# Altium PCB Keypadmacro.PcbDoc
Units mm, origin at the board's own origin, x right, y up, seen from the top; angles counter-clockwise.
Board outline 70 x 90 mm, 2 copper layers (F.Cu, B.Cu); 22 components, 0 nets, 131 pads, 0 vias.
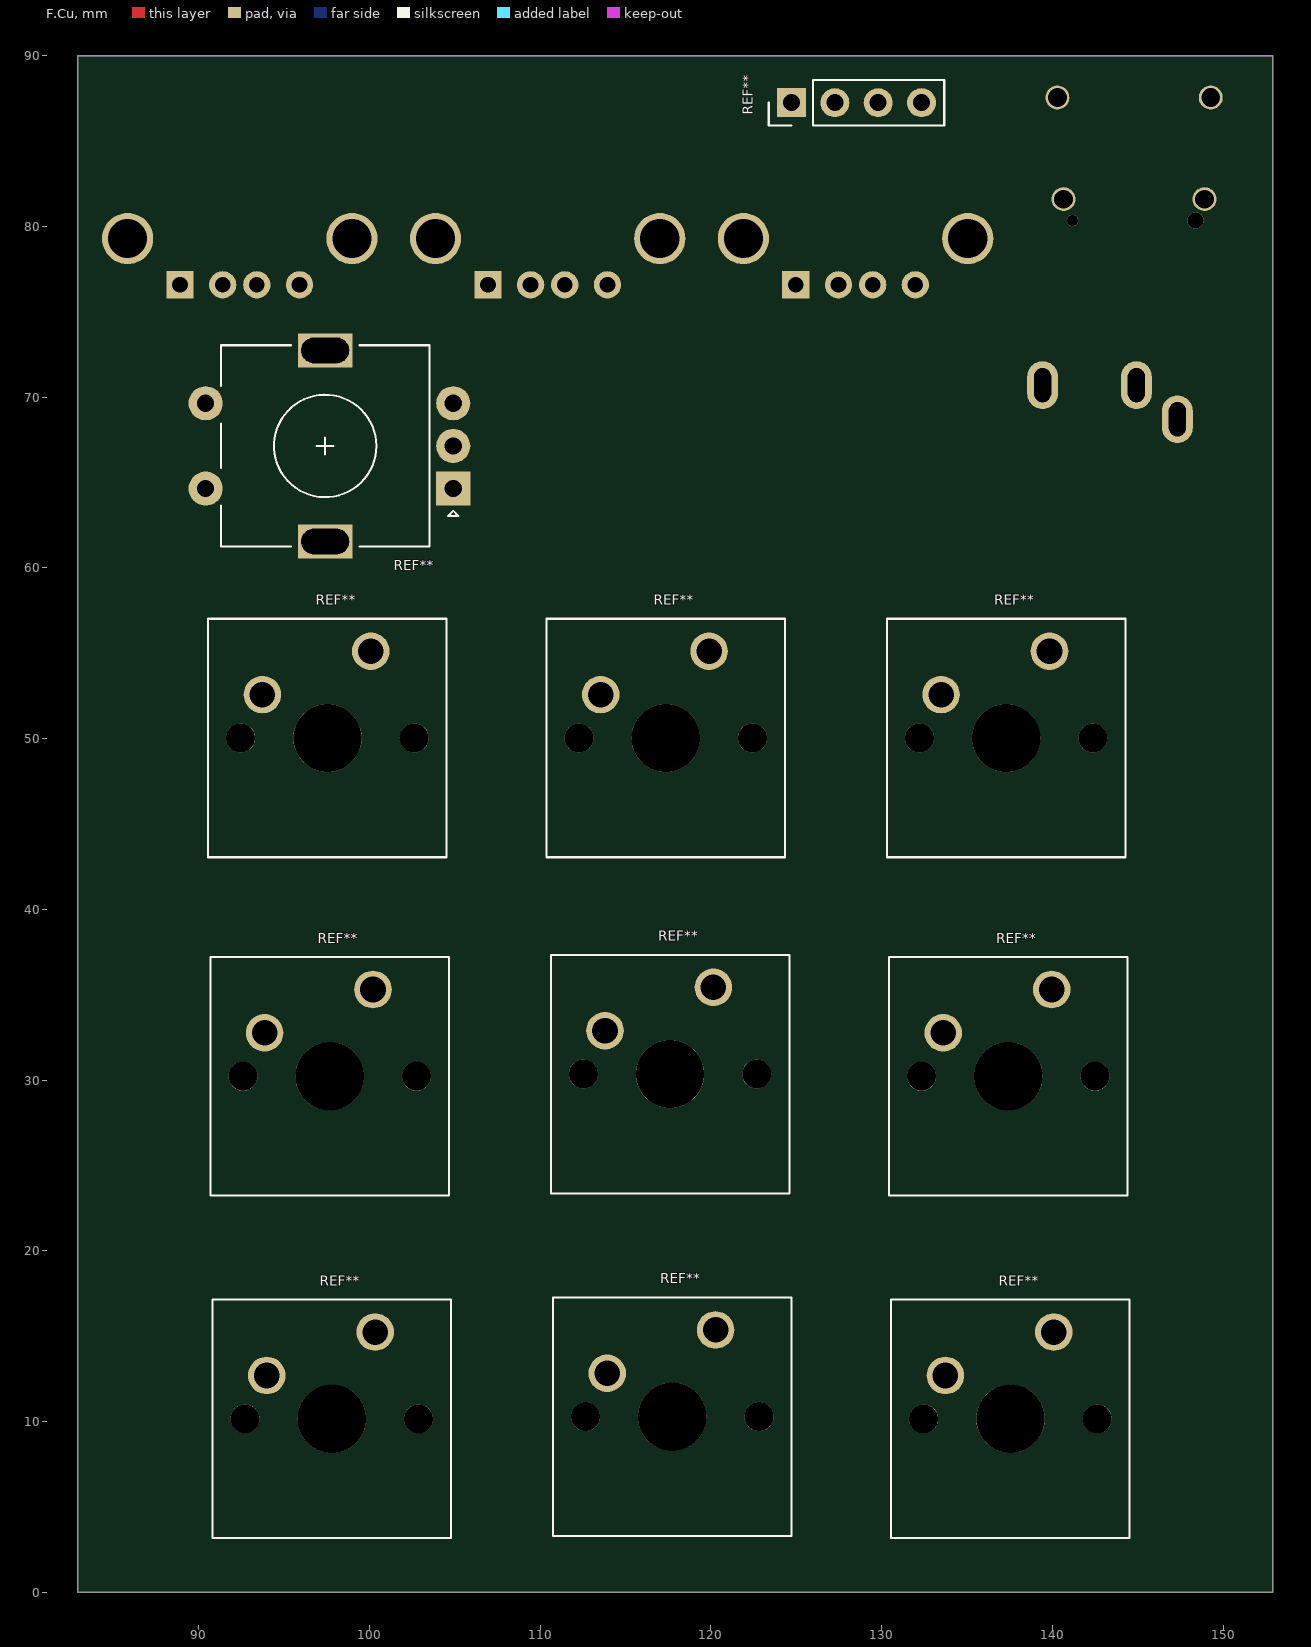
[diagram p0: F.Cu view]
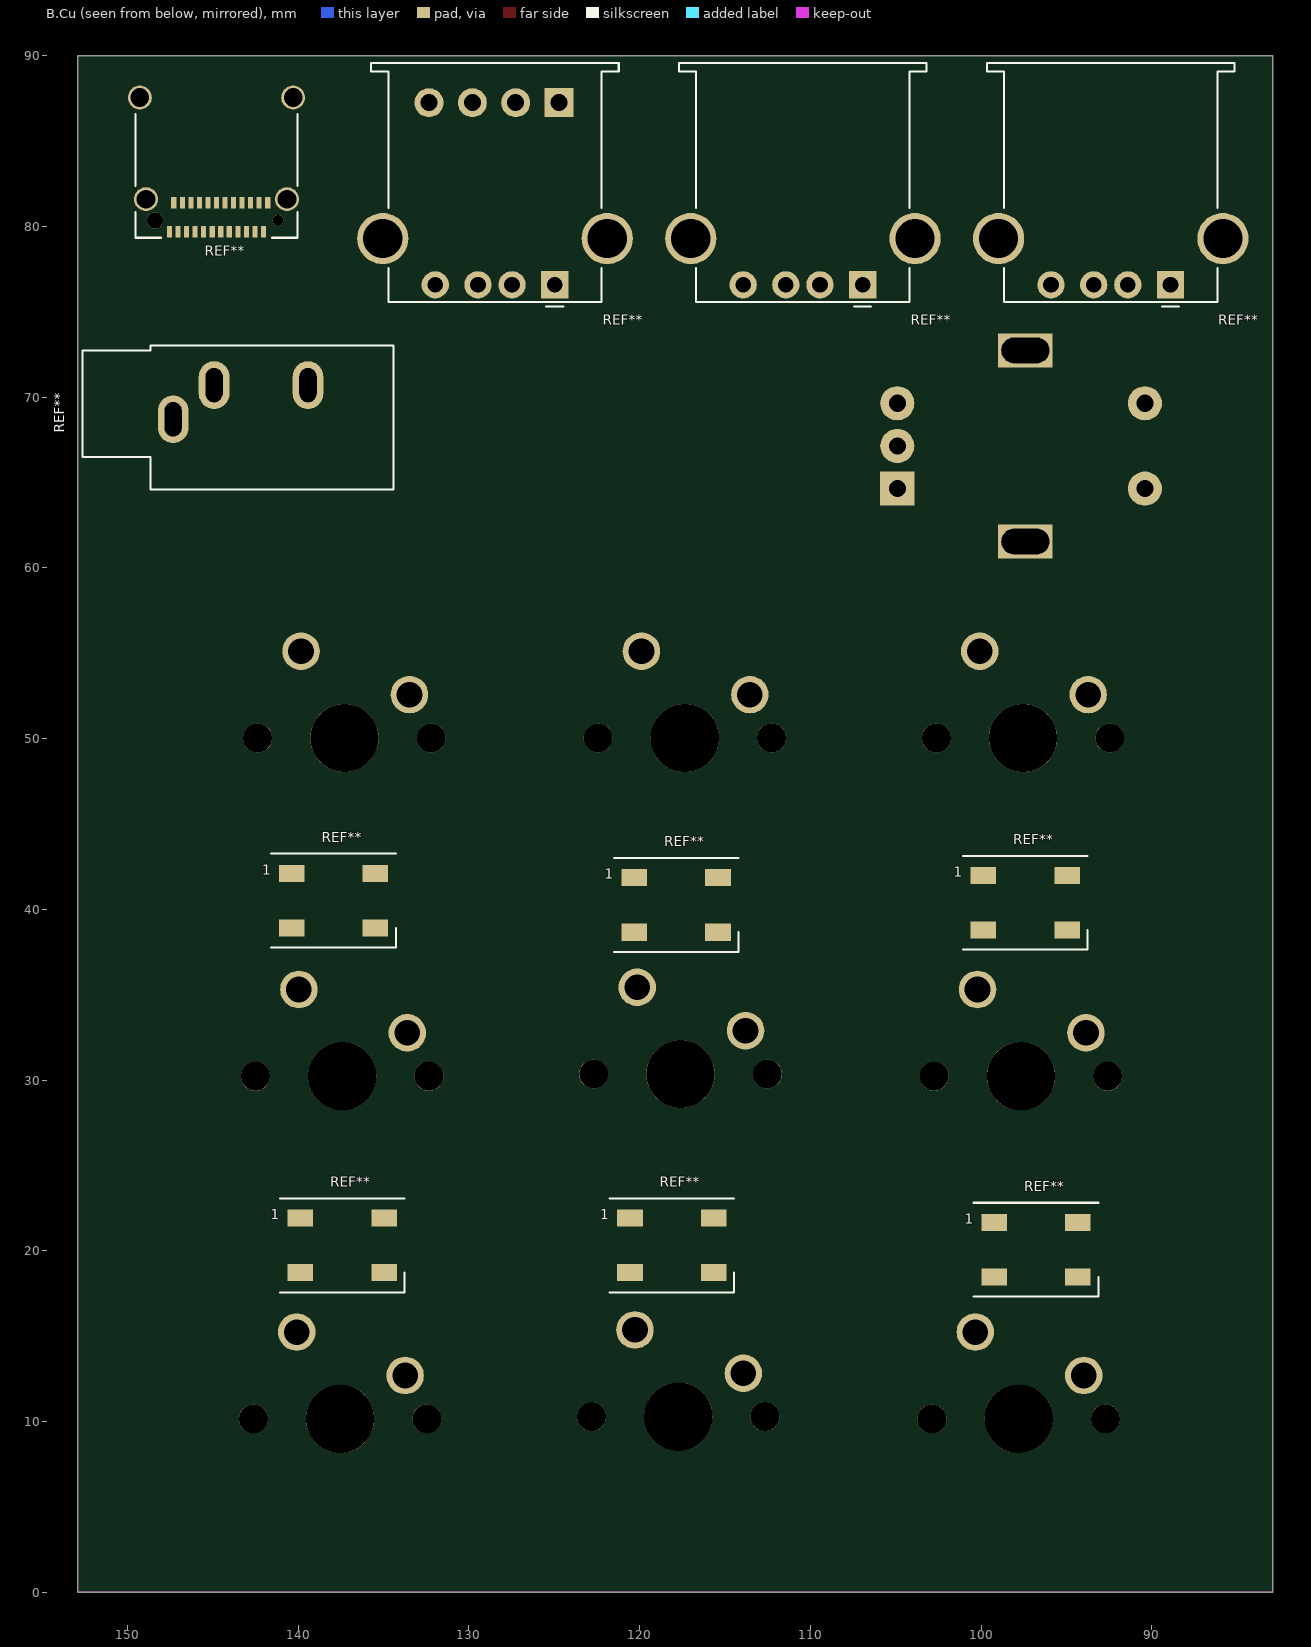
[diagram p1: B.Cu view, seen from below]

## Layer stack, top to bottom
F.Mask: solder mask 0.0102, Solder Resist, Dk 3.5
F.Cu: signal copper 0.0356
Dielectric 1: dielectric 0.32, FR-4, Dk 4.8
B.Cu: signal copper 0.0356
B.Mask: solder mask 0.0102, Solder Resist, Dk 3.5

## Board outline
82.908,0 82.908,90 152.908,90 152.908,0 82.908,0

## Design rules (kind name [scope] priority, off if disabled: settings)
Clearance "Clearence 0,2_NetClass" [InNetClass('Default')] p1: gap=0.2 ignorepadtopadclearanceinfootprint=FALSE
HoleSize "Hole Size (Default)" [All] p1: absolutevalues=TRUE maxlimit=10 minlimit=0.3 maxpercent=80.000 minpercent=20.000
MinimumSolderMaskSliver [All] p1: minsoldermaskwidth=0
PolygonConnect [All] p1: connectstyle=Direct reliefconductorwidth=0.254 reliefentries=4 polygonreliefangle="90 Angle" airgapwidth=0.254
RoutingVias [All] p1: holewidth=0.711 width=1.27 viastyle="Through Hole" minholewidth=0.711 minwidth=1.27 maxholewidth=0.711 maxwidth=1.27
SilkToSilkClearance [All] p1: silktosilkclearance=0
SilkToSolderMaskClearance [IsPad] p1: minsilkscreentomaskgap=0 clearancetoexposedcopper=TRUE
SolderMaskExpansion [All] p1: expansion=0.102 istentingtop=FALSE
Width [All] p1: maxlimit=0.254 minlimit=0.254 preferedwidth=0.254
26 further rules are at their usual default settings.

## Components (designator, comment, footprint, x,y, rotation, side; value= is the part's Value field where it differs from the comment)
REF** "LED_WS2812B_PLCC4_5.0x5.0mm_P3.2mm" LED_WS2812B_PLCC4_5.0x5.0mm_P3.2mm 97.409,40.386 r0 bottom
REF** "SW_Cherry_MX_1.00u_PCB" SW_Cherry_MX_1.00u_PCB#1 100.076,55.118 r0 top
REF** "SW_Cherry_MX_1.00u_PCB" SW_Cherry_MX_1.00u_PCB#2 119.888,55.118 r0 top
REF** "SW_Cherry_MX_1.00u_PCB" SW_Cherry_MX_1.00u_PCB#2 139.827,55.118 r0 top
REF** "SW_Cherry_MX_1.00u_PCB" SW_Cherry_MX_1.00u_PCB#2 100.203,35.306 r0 top
REF** "SW_Cherry_MX_1.00u_PCB" SW_Cherry_MX_1.00u_PCB#2 120.142,35.433 r0 top
REF** "SW_Cherry_MX_1.00u_PCB" SW_Cherry_MX_1.00u_PCB#2 139.954,35.306 r0 top
REF** "SW_Cherry_MX_1.00u_PCB" SW_Cherry_MX_1.00u_PCB#1 120.269,15.367 r0 top
REF** "SW_Cherry_MX_1.00u_PCB" SW_Cherry_MX_1.00u_PCB#1 140.081,15.24 r0 top
REF** "SW_Cherry_MX_1.00u_PCB" SW_Cherry_MX_1.00u_PCB#1 100.33,15.24 r0 top
REF** "LED_WS2812B_PLCC4_5.0x5.0mm_P3.2mm" LED_WS2812B_PLCC4_5.0x5.0mm_P3.2mm 117.856,40.259 r0 bottom
REF** "LED_WS2812B_PLCC4_5.0x5.0mm_P3.2mm" LED_WS2812B_PLCC4_5.0x5.0mm_P3.2mm 137.922,40.513 r0 bottom
REF** "LED_WS2812B_PLCC4_5.0x5.0mm_P3.2mm" LED_WS2812B_PLCC4_5.0x5.0mm_P3.2mm 137.414,20.32 r0 bottom
REF** "LED_WS2812B_PLCC4_5.0x5.0mm_P3.2mm" LED_WS2812B_PLCC4_5.0x5.0mm_P3.2mm 118.11,20.32 r0 bottom
REF** "LED_WS2812B_PLCC4_5.0x5.0mm_P3.2mm" LED_WS2812B_PLCC4_5.0x5.0mm_P3.2mm 96.774,20.066 r0 bottom
REF** "USB_C_Receptacle_Amphenol_12401610E4-2A_CircularHoles" USB_C_Receptacle_Amphenol_12401610E4-2A_CircularHoles 144.78,84.709 r180 bottom
REF** "RotaryEncoder_Alps_EC11E-Switch_Vertical_H20mm" RotaryEncoder_Alps_EC11E-Switch_Vertical_H20mm 104.902,64.643 r180 top
REF** "USB_A_Stewart_SS-52100-001_Horizontal" USB_A_Stewart_SS-52100-001_Horizontal 124.968,76.581 r180 bottom
REF** "USB_A_Stewart_SS-52100-001_Horizontal" USB_A_Stewart_SS-52100-001_Horizontal 106.934,76.581 r180 bottom
REF** "USB_A_Stewart_SS-52100-001_Horizontal" USB_A_Stewart_SS-52100-001_Horizontal 88.9,76.581 r180 bottom
REF** "PinHeader_1x04_P2.54mm_Vertical" PinHeader_1x04_P2.54mm_Vertical 124.714,87.249 r90 top
REF** "Jack_3.5mm_CUI_SJ1-3533NG_Horizontal" Jack_3.5mm_CUI_SJ1-3533NG_Horizontal 147.32,68.707 r270 bottom

## Footprints (in the part's own frame and the unit in brackets; to place one, negate y for a bottom-side part, rotate by r counter-clockwise, add the part's x,y. Pads: shape width x height; smd on the part's side, far side on the other; paste and mask are expansions set on the pad)
Jack_3.5mm_CUI_SJ1-3533NG_Horizontal [mm]
  rrect100% 2.8x1.8 hole 1 slot 2 at 0 deg paste-2.8 mask+0.051: R(-2,7.9) S(0,0) T(-2,2.4)
  silkscreen extent -4.32,-5.32 4.12,12.92
LED_WS2812B_PLCC4_5.0x5.0mm_P3.2mm [mm]
  rect 1.5x1 smd mask+0.051: 1(2.45,-1.6) 2(2.45,1.6) 3(-2.45,1.6) 4(-2.45,-1.6)
  silkscreen extent -3.65,-2.75 3.65,2.75
PinHeader_1x04_P2.54mm_Vertical [mm]
  rect 1.7x1.7 hole 1 paste-1.7 mask+0.051: 1(0,0)
  rrect100% 1.7x1.7 hole 1 paste-1.7 mask+0.051: 2(0,-2.54) 3(0,-5.08) 4(0,-7.62)
  silkscreen extent -1.33,-8.95 1.33,1.33
RotaryEncoder_Alps_EC11E-Switch_Vertical_H20mm [mm]
  rect 2x2 hole 1 paste-2 mask+0.051: A(0,0)
  round 2 hole 1 paste-2 mask+0.051: B(0,-5) C(0,-2.5) S1(14.5,-5) S2(14.5,0)
  rect 3.2x2 hole 1.5 slot 2.8 at 0 deg paste-3.2 mask+0.051: MP(7.5,3.1) MP(7.5,-8.1)
  silkscreen extent -0.3,-8.4 13.6,3.4
SW_Cherry_MX_1.00u_PCB#1 [mm]
  round 2.2 hole 1.5 paste-2.2 mask+0.051: 1(0,0) 2(-6.35,-2.54)
  round 1.7 hole 1.7 paste-1.7 mask+0.051: Un1(2.54,-5.08) Un2(-7.62,-5.08)
  round 4 hole 4 paste-4 mask+0.051: Un3(-2.54,-5.08)
  silkscreen extent -9.53,-12.06 4.44,1.91
SW_Cherry_MX_1.00u_PCB#2 [mm]
  round 2.2 hole 1.5 paste-2.2 mask+0.051: 1(0,0) 2(-6.35,-2.54)
  round 4 hole 4 paste-4 mask+0.051: Un1(-2.54,-5.08)
  round 1.7 hole 1.7 paste-1.7 mask+0.051: Un2(-7.62,-5.08) Un3(2.54,-5.08)
  silkscreen extent -9.53,-12.06 4.44,1.91
USB_A_Stewart_SS-52100-001_Horizontal [mm]
  rect 1.6x1.6 hole 0.92 paste-1.6 mask+0.051: 1(0,0)
  round 1.6 hole 0.92 paste-1.6 mask+0.051: 2(-2.5,0) 3(-4.5,0) 4(-7,0)
  round 3 hole 2.3 paste-3 mask+0.051: 5(-10.07,2.71) 5(3.07,2.71)
  silkscreen extent -10.75,-1.26 3.75,12.99
USB_C_Receptacle_Amphenol_12401610E4-2A_CircularHoles [mm]
  rect 0.3x0.7 smd mask+0.051: A1(2.75,-5.02) A2(2.25,-5.02) A3(1.75,-5.02) A4(1.25,-5.02) A5(0.75,-5.02) A6(0.25,-5.02) A7(-0.25,-5.02) A8(-0.75,-5.02) A9(-1.25,-5.02) A10(-1.75,-5.02) A11(-2.25,-5.02) A12(-2.75,-5.02) B1(-2.5,-3.32) B2(-2,-3.32) B3(-1.5,-3.32) B4(-1,-3.32) B5(-0.5,-3.32) B6(0,-3.32) B7(0.5,-3.32) B8(1,-3.32) B9(1.5,-3.32) B10(2,-3.32) B11(2.5,-3.32) B12(3,-3.32)
  round 1.4 hole 1.1 paste-1.4 mask+0.051: S1(-4.49,2.84) S1(-4.13,-3.11) S1(4.13,-3.11) S1(4.49,2.84)
  round 0.65 hole 0.65 paste-0.65 mask+0.051: Un1(3.6,-4.36)
  round 0.95 hole 0.95 paste-0.95 mask+0.051: Un2(-3.6,-4.36)
  silkscreen extent -4.75,-5.37 4.75,1.89

## Part data
REF** REF** REF** REF** REF** REF**: "https://cdn-shop.adafruit.com/datasheets/WS2812B.pdf"
REF** REF** REF** REF** REF** REF** REF** REF** REF**: "Cherry MX keyswitch, 1.00u, PCB mount, http://cherryamericas.com/wp-content/uploads/2014/12/mx_cat.pdf"
REF**: "USB TYPE C, RA RCPT PCB, SMT, https://www.amphenolcanada.com/StockAvailabilityPrice.aspx?From=&PartNum=12401610E4%7e2A"
REF**: "Alps rotary encoder, EC12E... with switch, vertical shaft, http://www.alps.com/prod/info/E/HTML/Encoder/Incremental/EC11/EC11E15204A3.html"
REF** REF** REF**: "USB A connector https://belfuse.com/resources/drawings/stewartconnector/dr-stw-ss-52100-001.pdf"
REF**: "Through hole straight pin header, 1x04, 2.54mm pitch, single row"
REF**: "TRS 3.5mm, horizontal, through-hole, https://www.cui.com/product/resource/sj1-353xng.pdf"

## Nets (pads, with @x,y where several pads share a name; then routed paths per layer and width w, separated by ;. In a path a pad name is that pad's centre, name@x,y a point inside that pad or via, vN(x,y) a via of type N, cw(c..) or ccw(c..) an arc to the next point about the centre after c; other vN are vias at no path point)
pads on no net: REF**.1 REF**.2 REF**.3 REF**.4 REF**.5 REF**.A REF**.A1 REF**.A2 REF**.A3 REF**.A4 REF**.A5 REF**.A6 REF**.A7 REF**.A8 REF**.A9 REF**.A10 REF**.A11 REF**.A12 REF**.B REF**.B1 REF**.B2 REF**.B3 REF**.B4 REF**.B5 REF**.B6 REF**.B7 REF**.B8 REF**.B9 REF**.B10 REF**.B11 REF**.B12 REF**.C REF**.MP REF**.R REF**.S REF**.S1 REF**.S2 REF**.T REF**.Un1 REF**.Un2 REF**.Un3

## Keep-outs
Edge.Cuts:
  lines w0.05: 82.908,0 152.908,0 ; 82.908,0 82.908,90 ; 82.908,0 152.908,0 ; 82.908,0 82.908,90 ; 82.908,90 152.908,90 ; 82.908,90 152.908,90 ; 152.908,0 152.908,90 ; 152.908,0 152.908,90

## Text inside footprints (layer, text, board x,y; h text height)
REF**: B.SilkS "1" at 101.595,41.709 h1
REF**: B.SilkS "1" at 122.042,41.582 h1
REF**: B.SilkS "1" at 142.108,41.836 h1
REF**: B.SilkS "1" at 141.6,21.643 h1
REF**: B.SilkS "1" at 122.296,21.643 h1
REF**: B.SilkS "1" at 100.96,21.389 h1